# EAGLE board Template (EAGLE 7.5.0)

Size 100 x 80 mm. Coordinates in mm from the lower left corner, seen from the top.
Outline: 0,0 100,0 100,80 0,80 0,0
Copper layers (1*16): Top 0.035mm / dielectric 1.5mm / Bottom 0.035mm
Design rules "default": minimum track width 10mil, minimum drill 24mil, track to track 8mil, track to pad 8mil, pad to pad 8mil, via to via 8mil, smd to smd 8mil, copper to edge 40mil, drill to drill 8mil, minimum pad ring 10mil, minimum via ring 8mil, stop-mask expansion 4mil, vias tented up to drill 0mil, thermal gap 10mil

## Footprints (pad centres in the part's own frame; a part is rotated, then mirrored left to right if it is on the bottom)
C1206 = smd 1.6 x 1.8: 1 -1.4,0; 2 1.4,0
0402-CAP = smd 0.85 x 0.9: 1 -0.58,0; 2 0.58,0
NIC_10X10.5_CAP = smd 4.5 x 2.5: + 4.5,0; - -4.5,0
0603-CAP = smd 1.1 x 1: 1 -0.85,0; 2 0.85,0
SOD-923 = smd 0.36 x 0.25: A -0.6,0; C 0.6,0
SOD523 = smd 0.7 x 0.5: A 0.7,0; C -0.6,0
LED_RGB = smd 1.2 x 0.9: 1-RED 1.4,-0.725; 2-CA -1.4,-0.725; 3-BL -1.4,0.725; 4-GR 1.4,0.725
LED_RGB_BOTTOM = smd 1.4 x 0.8: B-3 -2.6,-0.725; CA-2 -2.6,0.725; G-4 2.6,-0.725; R-1 2.6,0.725 | hole 3.2: 0,0
PI_EE-SX1108 = smd 1.6 x 2: A 1.1,2.5; C -1.1,2.5; TC 1.1,-2.5; TE -1.1,-2.5
FIDUCIAL-1X2 = smd 1 x 1: 1 0,0
QFN.24.4X4 = smd 0.85 x 0.38: 1 -2.007,1.25; 2 -1.975,0.75; 3 -1.975,0.25; 4 -1.975,-0.25; 5 -1.975,-0.75; 6 -2.007,-1.25; 13 2.007,-1.25; 14 1.975,-0.75; 15 1.975,-0.25; 16 1.975,0.25; 17 1.975,0.75; 18 2.007,1.25 | smd 0.38 x 0.85: 7 -1.25,-2.007; 8 -0.75,-1.975; 9 -0.25,-1.975; 10 0.25,-1.975; 11 0.75,-1.975; 12 1.25,-2.007; 19 1.25,2.007; 20 0.75,1.975; 21 0.25,1.975; 22 -0.25,1.975; 23 -0.75,1.975; 24 -1.25,2.007
DPAK = smd 1.6 x 3: 1 -2.3,-2.54; 2 2.3,-2.54 | smd 5.8 x 6.2: 3 0,4.64
SOT223 = smd 1.219 x 2.235: 1 -2.311,-3.099; 2 0,-3.099; 3 2.311,-3.099 | smd 3.6 x 2.2: 4 0,3.099
DHVQFN16 = smd 0.24 x 0.9: 1 -0.5,1.8; 8 -0.5,-1.8; 9 0.5,-1.8; 16 0.5,1.8 | smd 0.9 x 0.24: 2 -1.3,1.25; 3 -1.3,0.75; 4 -1.3,0.25; 5 -1.3,-0.25; 6 -1.3,-0.75; 7 -1.3,-1.25; 10 1.3,-1.25; 11 1.3,-0.75; 12 1.3,-0.25; 13 1.3,0.25; 14 1.3,0.75; 15 1.3,1.25 | smd 0.9 x 1.9: EPAD 0,0
BQ24040DSQR = smd 0.7 x 0.23: 1 -1.05,0.8; 2 -1.05,0.4; 3 -1.05,0; 4 -1.05,-0.4; 5 -1.05,-0.8; 6 1.05,-0.8; 7 1.05,-0.4; 8 1.05,0; 9 1.05,0.4; 10 1.05,0.8 | smd 0.914 x 1.499: 11 0,0 | drill 0.254 pad 0.508: V 0,0
SO08-TIGHT = smd 0.6 x 1.2: 1 -1.905,-2.8; 2 -0.635,-2.8; 3 0.635,-2.8; 4 1.905,-2.8; 5 1.905,2.8; 6 0.635,2.8; 7 -0.635,2.8; 8 -1.905,2.8
WT8266 = smd 1.5 x 1: 1 -7.35,4.75; 2 -7.35,3.25; 3 -7.35,1.75; 4 -7.35,0.25; 5 -7.35,-1.25; 6 -7.35,-2.75; 13 8.15,-2.75; 14 8.15,-1.25; 15 8.15,0.25; 16 8.15,1.75; 17 8.15,3.25; 18 8.15,4.75 | smd 1 x 1.5: 7 -3.2,-6.35; 8 -1.7,-6.35; 9 -0.2,-6.35; 10 1.3,-6.35; 11 2.8,-6.35; 12 4.3,-6.35
DSS12_P9X2 = smd 0.5 x 0.28: 1 -0.959,1.25; 2 -0.959,0.75; 3 -0.959,0.25; 4 -0.959,-0.25; 5 -0.959,-0.75; 6 -0.959,-1.25; 7 0.959,-1.25; 8 0.959,-0.75; 9 0.959,-0.25; 10 0.959,0.25; 11 0.959,0.75; 12 0.959,1.25 | smd 0.9 x 2: 13 0,0 | drill 0.254 pad 0.508: G1 0,0.406; G2 0,-0.406
TSSOP8-0.65-3X4.4MM = smd 0.4 x 1.27: 1 -0.975,-2.9; 2 -0.325,-2.9; 3 0.325,-2.9; 4 0.975,-2.9; 5 0.975,2.9; 6 0.325,2.9; 7 -0.325,2.9; 8 -0.975,2.9
CONN_JACK_SMD = smd 2.2 x 1.8: 1 4.9,-3.6; 2 2,4; 3 4.9,4 | hole 1.3: -3,1.5; -3,-2.5
USB-A-VERTICAL_MOUNT = drill 0.9: 1 -3.5,3.01; 2 -1,3.01; 3 1,3.01; 4 3.5,3.01 | hole 2.3: -6.57,0.3; 6.57,0.3
USB-MICRO-MOLEX-105017-0001 = smd 0.4 x 1.35: 1 -1.3,1.3; 2 -0.65,1.3; 3 0,1.3; 4 0.65,1.3; 5 1.3,1.3 | drill 0.85 pad 1.45: G1 -2.5,1.3; G2 2.5,1.3 | smd 1.5 x 1.9: G3 1,-1.4; G4 -1,-1.4
R1206 = smd 1.6 x 1.803: 1 -1.422,0; 2 1.422,0
R0402 = smd 0.7 x 0.9: 1 -0.65,0; 2 0.65,0
0603-ARV = smd 0.5 x 0.65: 1 -1.2,-0.625; 2 -0.4,-0.625; 3 0.4,-0.625; 4 1.2,-0.625; 5 1.2,0.625; 6 0.4,0.625; 7 -0.4,0.625; 8 -1.2,0.625
RA1206-8 = smd 0.7 x 1: 1 -1.3,-0.85; 4 1.3,-0.85; 5 1.3,0.85; 8 -1.3,0.85 | smd 0.5 x 1: 2 -0.4,-0.85; 3 0.4,-0.85; 6 0.4,0.85; 7 -0.4,0.85
ANGLE_SENSOR_MURATA = smd 1.8 x 2: 1 -2.5,-7.7; 2@1 0,-7.7; 2@2 0,6.2; 3 2.5,-7.7 | hole 5.1: 0,0 | hole 1.2: -4.24,-5.51; 4.24,-5.53
TACTILE-PTH-SIDEEZ = drill 0.8 pad 1.7: 1 -2.5,0; 2 2.5,0 | drill 1.2 pad 2.2: ANCHOR1 -3.5,2.5; ANCHOR2 3.5,2.5
TACTILE_SWITCH_TALL = smd 1.55 x 1.3: A1 -3.975,-2.25; A2 3.975,-2.25; B1 -3.975,2.25; B2 3.975,2.25
SOT23-6 = smd 0.6 x 0.9: 1 -0.95,-1.15; 2 0,-1.15; 3 0.95,-1.15; 4 0.95,1.15; 5 0,1.15; 6 -0.95,1.15
SOT-23 = smd 1.016 x 1.143: 1 -0.889,-1.016; 2 0.889,-1.016; 3 0,1.016

## Placement (x,y rotation side)
C1  100Uf  [C1206]  -17.78,66.04 0 top  (outside the outline)
C5  2200pF  [0402-CAP]  -69.85,71.12 0 top  (outside the outline)
C6  10000pF  [0402-CAP]  -15.24,77.47 0 top  (outside the outline)
C7  100uF  [NIC_10X10.5_CAP]  -41.91,27.94 0 top  (outside the outline)
C8  0.1uF  [0402-CAP]  -19.05,77.47 0 top  (outside the outline)
C9  10uF  [0402-CAP]  -22.86,77.47 0 top  (outside the outline)
C11  0.1uF  [0603-CAP]  -58.42,71.12 0 top  (outside the outline)
C13  0.1uF  [0603-CAP]  -62.23,71.12 0 top  (outside the outline)
C14  0.1uF  [0603-CAP]  -66.04,71.12 0 top  (outside the outline)
D1  ESD9X5.0ST5G  [SOD-923]  -75,2 0 top  (outside the outline)
D2  PMEG3005EB  [SOD523]  -63.5,64.77 0 top  (outside the outline)
D3  [LED_RGB]  -48.26,64.77 0 top  (outside the outline)
D4  [LED_RGB_BOTTOM]  -59.69,24.13 0 top  (outside the outline)
D5  LED_IR_EMITTER_DET-EESX1108  [PI_EE-SX1108]  -22.86,41.91 0 top  (outside the outline)
FID1  FIDUCIAL1X2  [FIDUCIAL-1X2]  -26.67,76.2 0 top  (outside the outline)
FID2  FIDUCIAL1X2  [FIDUCIAL-1X2]  -29.21,76.2 0 top  (outside the outline)
FID3  FIDUCIAL1X2  [FIDUCIAL-1X2]  -31.75,76.2 0 top  (outside the outline)
FID4  FIDUCIAL1X2  [FIDUCIAL-1X2]  -34.29,76.2 0 top  (outside the outline)
FID5  FIDUCIAL1X2  [FIDUCIAL-1X2]  -36.83,76.2 0 top  (outside the outline)
FID6  FIDUCIAL1X2  [FIDUCIAL-1X2]  -39.37,76.2 0 top  (outside the outline)
FID7  FIDUCIAL1X2  [FIDUCIAL-1X2]  -41.91,76.2 0 top  (outside the outline)
FID8  FIDUCIAL1X2  [FIDUCIAL-1X2]  -44.45,76.2 0 top  (outside the outline)
IC1  SENSOR_IMU_MPU-6050  [QFN.24.4X4]  -29.21,66.04 0 top  (outside the outline)
IC3  LD29150DT50R_5V  [DPAK]  -30.48,25.4 0 top  (outside the outline)
IC5  MPU-6050  [QFN.24.4X4]  -35.56,66.04 0 top  (outside the outline)
IC6  LM1117_3.3VSOT223  [SOT223]  -66.04,41.91 0 top  (outside the outline)
IC7  74HC4051_DHVQFN16  [DHVQFN16]  -60.96,50.8 0 top  (outside the outline)
IC8  SENSOR_IMU_MPU-6050  [QFN.24.4X4]  -41.91,66.04 0 top  (outside the outline)
IC9  BQ24040DSQR_BMS  [BQ24040DSQR]  -54.61,72.39 0 top  (outside the outline)
IC10  LMV358SOICT  [SO08-TIGHT]  -24.13,58.42 0 top  (outside the outline)
IC11  WT8266  [WT8266]  -22.86,7.62 0 top  (outside the outline)
IC12  MOTOR_DRV8835_DSS_12  [DSS12_P9X2]  -49.53,50.8 0 top  (outside the outline)
IC13  BQ2057WTS  [TSSOP8-0.65-3X4.4MM]  -17.78,26.67 0 top  (outside the outline)
J1  PJ1-021-SMT  [CONN_JACK_SMD]  -63.5,8.89 0 top  (outside the outline)
J2  [USB-A-VERTICAL_MOUNT]  -21.59,50.8 0 top  (outside the outline)
J3  [USB-MICRO-MOLEX-105017-0001]  -41.91,59.69 0 top  (outside the outline)
R1  0.02E, 1W  [R1206]  -71.12,58.42 0 top  (outside the outline)
R2  68k  [R0402]  -26.67,72.39 0 top  (outside the outline)
R3  100k  [R0402]  -16.51,72.39 0 top  (outside the outline)
R4  1k  [R0402]  -44.45,72.39 0 top  (outside the outline)
R5  1M  [R0402]  -40.64,72.39 0 top  (outside the outline)
R8  10k  [R0402]  -31.75,72.39 0 top  (outside the outline)
R9  10k  [R0402]  -36.83,72.39 0 top  (outside the outline)
R10  10k  [R0402]  -21.59,72.39 0 top  (outside the outline)
R11  7.68k  [R0402]  -69.85,64.77 0 top  (outside the outline)
R12  330E  [0603-ARV]  -22.86,66.04 0 top  (outside the outline)
R13  510k  [RA1206-8]  -48.26,58.42 0 top  (outside the outline)
R15  10k  [ANGLE_SENSOR_MURATA]  -39.37,8.89 0 top  (outside the outline)
S1  SWITCH-MOMENTARY-2SIDE_EZ  [TACTILE-PTH-SIDEEZ]  -52.07,12.7 0 top  (outside the outline)
S2  SWITCH-MOMENTARY-2SMD-4  [TACTILE_SWITCH_TALL]  -55.88,41.91 0 top  (outside the outline)
T3  IRLTS2242-PMOS  [SOT23-6]  -60.96,58.42 0 top  (outside the outline)
T4  MMBT3904LT1G  [SOT-23]  -34.29,58.42 0 top  (outside the outline)

## Library data of the parts
C1 = eagle-ltspice; SPICEMODEL: NONE; SPICEPREFIX: C
C5 C6 C8 C9 = 1_ZeroUI; PROD_ID: CAP-12416
C7 = 1_ZeroUI; PROD_ID: CAP-08362
C11 C13 C14 = SparkFun-Capacitors; PROD_ID: CAP-08604
D1 D3 D5 IC1 IC7 IC8 IC11 J1-J3 R15 S1 T3 = 1_ZeroUI
D2 = diode
D4 = 1_ZeroUI; PROD_ID: DIO-12986
FID1-FID8 = SparkFun-Aesthetics
IC3 = 1_ZeroUI; MPN: NTD5805NT4G
IC5 = AHandimate
IC6 = 1_ZeroUI; PROD_ID: VREG-08170
IC9 = 1_ZeroUI; 3D_LIBRARY_NAME: TI_AllParts_2012-12-25; COPYRIGHT: Copyright (C) 2015 Accelerated Designs. All rights reserved; DATASHEETURL: http://www.ti.com/lit/gpn/BQ24040; FAMILY_NAME: BATTERY CHARGE MANAGEMENT; GENERIC_PART_NUMBER: BQ24040; INDUSTRY_STD_PKG_TYPE: SON; MANUFACTURER: Texas Instruments; MANUFACTURER_PART_NUMBER: BQ24040DSQR; PACKAGE_DESIGNATOR: DSQ; PIN_COUNT: 10; VENDOR: Vendor
IC10 = 1_ZeroUI; PROD_ID: IC-09657
IC12 = 1_ZeroUI; MANUFACTURER_PART_NUMBER: drv8835_dss_12; VENDOR: Texas Instruments
IC13 = Seeed-OPL-ic; MPN: BQ2057WTS
R1-R5 R8-R11 = rcl
R12 = SparkFun-Passives
R13 = Seeed-OPL-Resistor
S2 = 1_ZeroUI; PROD_ID: SWCH-11966
T4 = 1_ZeroUI; MPN: MMBT3904LT1G

## Nets
+V: IC10.8
EPAD: IC9.11
GND: C11.2 C13.2 C14.2 IC5.1 IC5.9 IC5.11 IC5.18 IC10.4 IC12.6 J2.4 J3.5
I2C_N: IC5.24 R8.1
I2C_P: IC5.23 R9.1
N$10: C14.1 IC5.10
N$11: C13.1 IC5.20
VBUS: J2.1 J3.1
VCC: C11.1 IC5.8 IC5.13 IC12.12 IC13.3 R8.2 R9.2
VM: IC12.1
VSS: IC9.3

## Tracks (layer width: path | path; a pad name or v marks a point on that pad's centre or on a via)
GND  (10 unrouted)
I2C_N  (1 unrouted)
I2C_P  (1 unrouted)
N$10  (1 unrouted)
N$11  (1 unrouted)
VBUS  (1 unrouted)
VCC  (6 unrouted)